# EAGLE board rev6 (EAGLE 9.4.2)
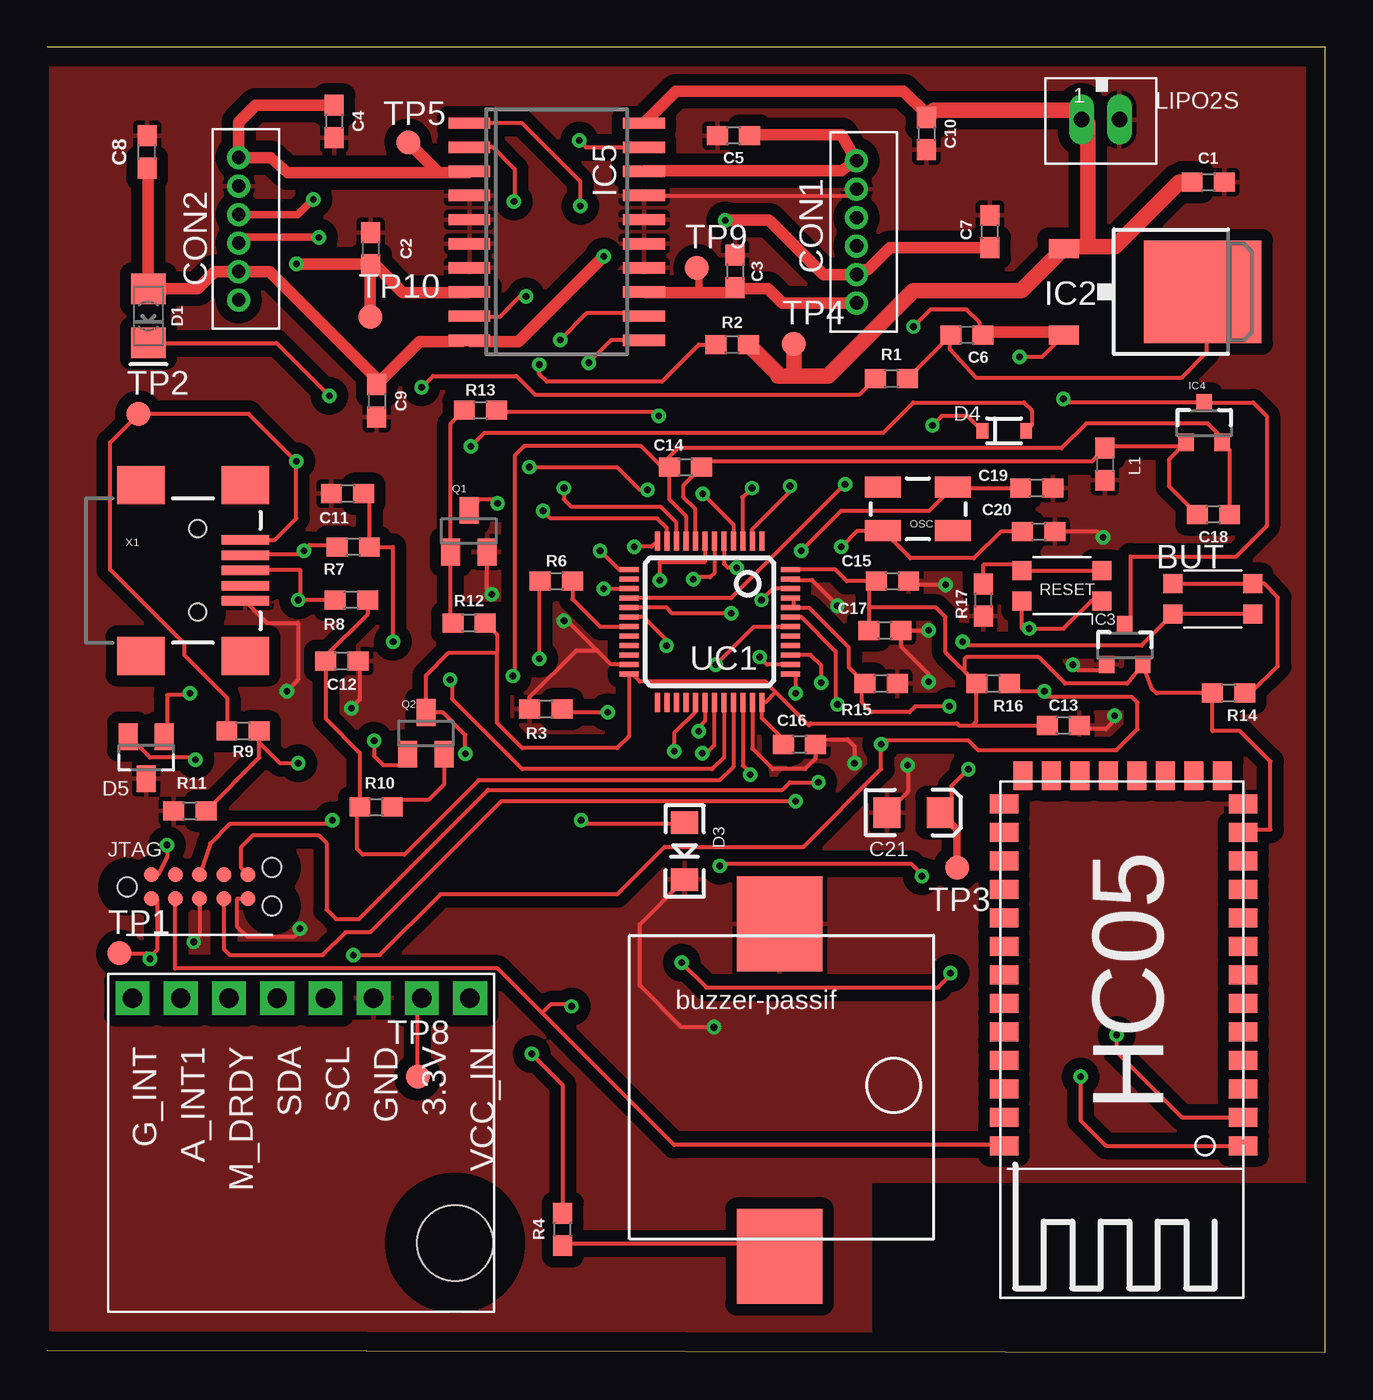
[diagram p0: board, top side]
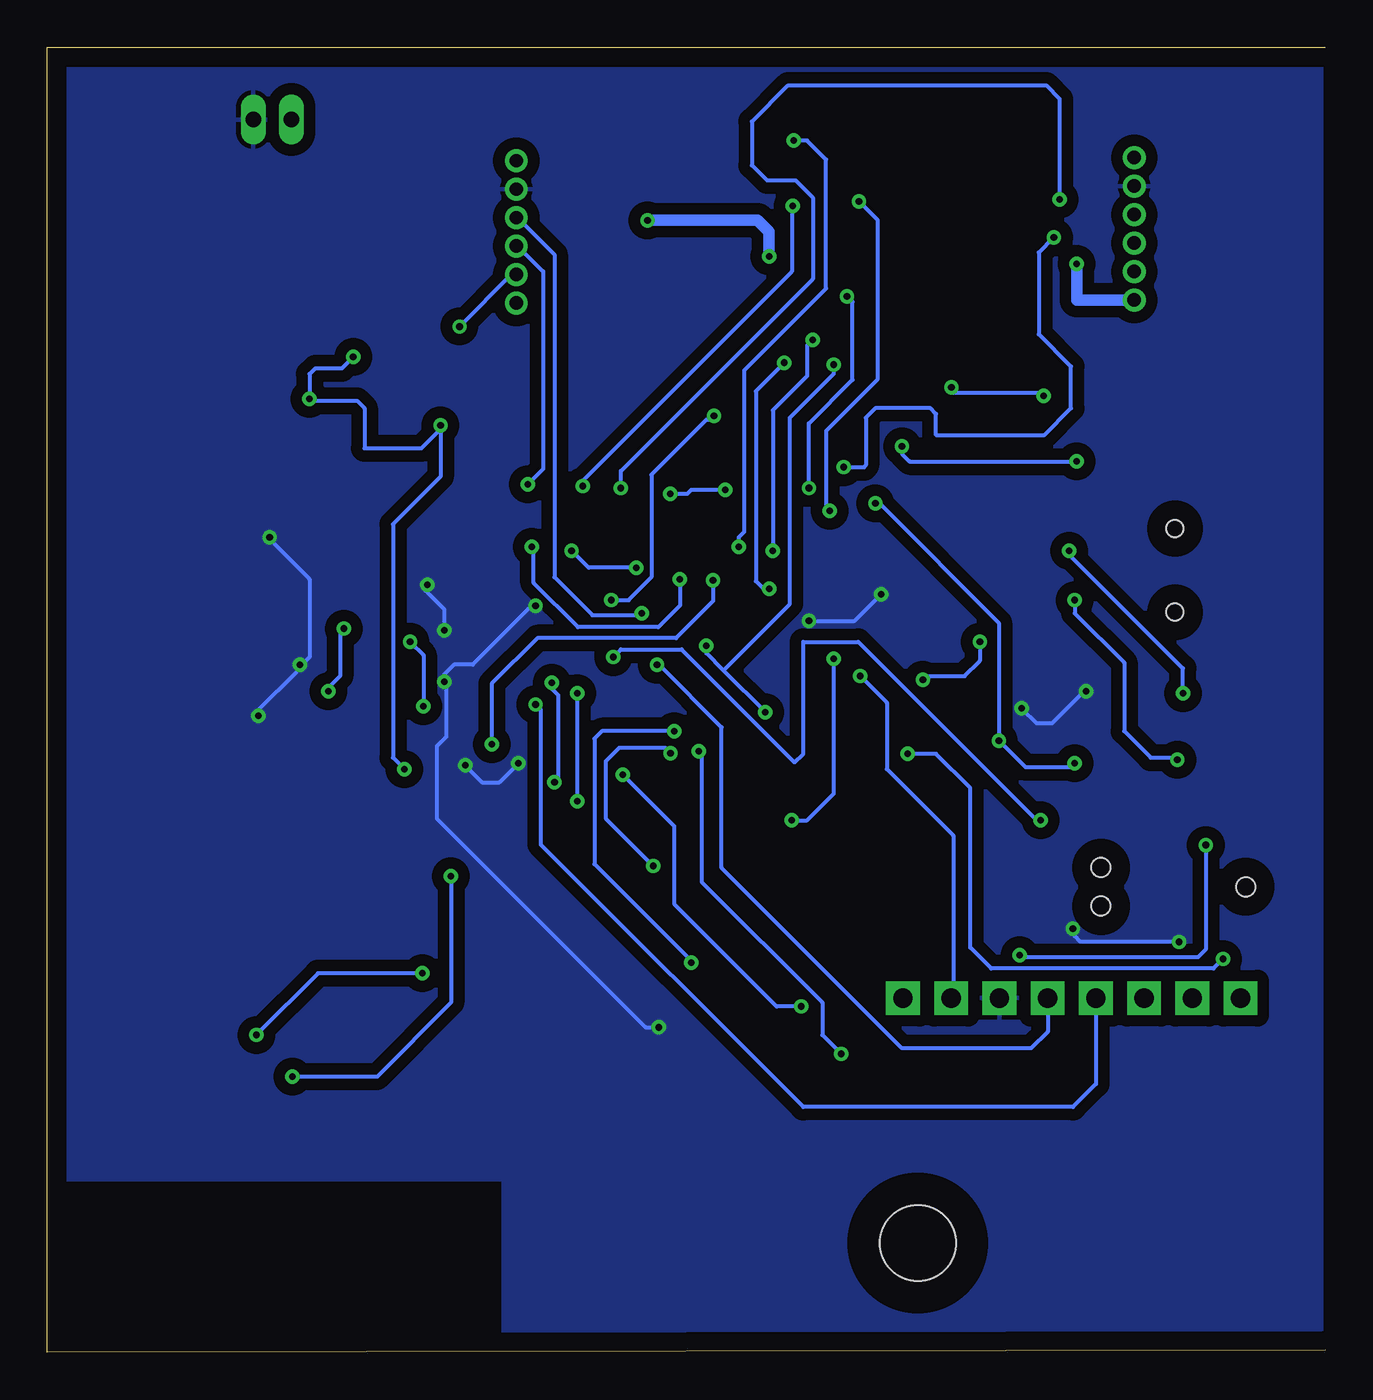
[diagram p1: board, bottom side, seen from below]

Size 67.3 x 68.7 mm. Coordinates in mm from the lower left corner, seen from the top.
Outline: 0,0.1 67.3,0 67.3,68.7 0,68.7
Copper layers (1*16): Top 0.035mm / dielectric 1.5mm / Bottom 0.035mm
Design rules "default": minimum track width 6mil, minimum drill 0.35mm, track to track 6mil, track to pad 6mil, pad to pad 6mil, via to via 6mil, smd to smd 6mil, copper to edge 40mil, drill to drill 6mil, minimum pad ring 10mil, minimum via ring 8mil, stop-mask expansion 4mil, vias tented up to drill 0mil, thermal gap 10mil
Net classes: 0 default: width 0.203 mm; 2 bigalime: width 0.381 mm

## Footprints (pad centres in the part's own frame; a part is rotated, then mirrored left to right if it is on the bottom)
PUSHBUTTON-KMR241GLFS = smd 1 x 1: P$1 2.1,0.8; P$2 2.1,-0.8; P$3 -2.1,0.8; P$4 -2.1,-0.8
0603 = smd 1.1 x 1: 1 -0.85,0; 2 0.85,0
EIA3216 = smd 1.4 x 1.6: A 1.4,0; C -1.4,0
B6B-ZR = drill 0.7: 1 9,-1.3; 2 7.5,-1.3; 3 6,-1.3; 4 4.5,-1.3; 5 3,-1.3; 6 1.5,-1.3
FKIT-LED-1206 = smd 1.6 x 1.803: A -1.422,0; C 1.422,0
LED-1206 = smd 1.2 x 1.4: A -1.5,0; C 1.5,0
SOD-323 = smd 0.63 x 0.83: 1 -1.15,0; 2 1.15,0
SOT23 = smd 1 x 1.4: 1 -0.95,-1.1; 2 0.95,-1.1; 3 0,1.1
DPACK_3 = smd 1 x 1.6: 1 -2.28,-4.8; 3 2.28,-4.8 | smd 5.4 x 6.2: 4 0,2.5
SOT23' = smd 0.8 x 0.9: 1 -0.95,-1; 2 0.95,-1; 3 0,1.1
SO20 = smd 0.6 x 2.2: 1 -5.715,-4.6; 2 -4.445,-4.6; 3 -3.175,-4.6; 4 -1.905,-4.6; 5 -0.635,-4.6; 6 0.635,-4.6; 7 1.905,-4.6; 8 3.175,-4.6; 9 4.445,-4.6; 10 5.715,-4.6; 11 5.715,4.6; 12 4.445,4.6; 13 3.175,4.6; 14 1.905,4.6; 15 0.635,4.6; 16 -0.635,4.6; 17 -1.905,4.6; 18 -3.175,4.6; 19 -4.445,4.6; 20 -5.715,4.6
TC2030-MCP-NL = smd 0.787 x 0.787: 1 1.27,-0.635; 2 2.54,-0.635; 3 3.81,-0.635; 4 5.08,-0.635; 5 6.35,-0.635; 6 6.35,0.635; 7 5.08,0.635; 8 3.81,0.635; 9 2.54,0.635; 10 1.27,0.635 | hole 1: 0,0; 7.62,-1.016; 7.62,1.016
JST_B2B-PH_HEADER = drill 0.8 long: P1 1.075,0.048; P2 -0.925,0.048
CRYSTAL-SMD-5X3 = smd 1.9 x 1.1: 1 -1.85,-1.15; 2 1.85,-1.15; 3 1.85,1.15; 4 -1.85,1.15
B1,27 = smd 1.27 x 1.27: TP 0,0
BUZZER-PASSIF = smd 4.5 x 5: P$1 0,2.5; P$2 0,20
HC-05 = smd 1.5 x 1: 3.3 0,-16.5; GND 0,-18; KEY 12.6,0; P$3 0,-3; P$4 0,-4.5; P$5 0,-6; P$6 0,-7.5; P$7 0,-9; P$8 0,-10.5; P$9 0,-12; P$10 0,-13.5; P$11 0,-15; P$23 12.6,-1.5; P$24 12.6,-3; P$25 12.6,-4.5; P$26 12.6,-6; P$27 12.6,-7.5; P$28 12.6,-9; P$29 12.6,-10.5; P$30 12.6,-12; P$31 12.6,-13.5; P$32 12.6,-15; P$33 12.6,-16.5; P$34 12.6,-18; RX 0,-1.5; TX 0,0 | smd 1 x 1.5: P$14 1.1,-19.5; P$15 2.6,-19.5; P$16 4.1,-19.5; P$17 5.6,-19.5; P$18 7.1,-19.5; P$19 8.6,-19.5; P$20 10.1,-19.5; P$21 11.6,-19.5
GY-85 = drill 1.016 pad 1.778 square: 3.3 0,15.24; A_INT1 0,2.54; G_INT 0,0; GND 0,12.7; M_DRDY 0,5.08; SCL 0,10.16; SDA 0,7.62; VCC_IN 0,17.78 | hole 4: 12.9,17
LQFP48 = smd 0.254 x 1: 1 -2.75,-4.25; 2 -2.25,-4.25; 3 -1.75,-4.25; 4 -1.25,-4.25; 5 -0.75,-4.25; 6 -0.25,-4.25; 7 0.25,-4.25; 8 0.75,-4.25; 9 1.25,-4.25; 10 1.75,-4.25; 11 2.25,-4.25; 12 2.75,-4.25; 25 2.75,4.25; 26 2.25,4.25; 27 1.75,4.25; 28 1.25,4.25; 29 0.75,4.25; 30 0.25,4.25; 31 -0.25,4.25; 32 -0.75,4.25; 33 -1.25,4.25; 34 -1.75,4.25; 35 -2.25,4.25; 36 -2.75,4.25 | smd 1 x 0.254: 13 4.25,-2.75; 14 4.25,-2.25; 15 4.25,-1.75; 16 4.25,-1.25; 17 4.25,-0.75; 18 4.25,-0.25; 19 4.25,0.25; 20 4.25,0.75; 21 4.25,1.25; 22 4.25,1.75; 23 4.25,2.25; 24 4.25,2.75; 37 -4.25,2.75; 38 -4.25,2.25; 39 -4.25,1.75; 40 -4.25,1.25; 41 -4.25,0.75; 42 -4.25,0.25; 43 -4.25,-0.25; 44 -4.25,-0.75; 45 -4.25,-1.25; 46 -4.25,-1.75; 47 -4.25,-2.25; 48 -4.25,-2.75
USB-MINIB = smd 2.5 x 0.5: D+ 2.5,0; D- 2.5,0.8; GND 2.5,-1.6; ID 2.5,-0.8; VBUS 2.5,1.6 | smd 2.5 x 2: GND@1 -3,-4.5; GND@2 -3,4.5; GND@3 2.5,4.5; GND@4 2.5,-4.5 | hole 0.9: 0,2.2; 0,-2.2

## Placement (x,y rotation side)
BUT  KMR211GLFS  [PUSHBUTTON-KMR241GLFS]  61.37,39.66 0 top
C1  0.1uF  [0603]  61.13,61.61 0 top
C2  22nF  [0603]  17.02,58.11 270 top
C3  22nF  [0603]  36.21,56.91 270 top
C4  22nF  [0603]  15.1,64.81 270 top
C5  22nF  [0603]  36.13,64.06 180 top
C6  0.1uF  [0603]  48.42,53.56 180 top
C7  22nF  [0603]  49.64,59.01 90 top
C8  22nF  [0603]  5.24,63.2 90 top
C9  22nF  [0603]  17.34,50.09 270 top
C10  22nF  [0603]  46.28,64.16 270 top
C11  47pF  [0603]  15.8,45.2 180 top
C12  47pF  [0603]  15.5,36.4 0 top
C13  10uF  [0603]  53.5,33 0 top
C14  1uF  [0603]  33.6,46.6 0 top
C15  1uF  [0603]  44.5,40.6 0 top
C16  1uF  [0603]  39.6,32 0 top
C17  1uF  [0603]  44.1,38 0 top
C18  10uF  [0603]  61.4,44.1 180 top
C19  18pF  [0603]  52.1,45.5 0 top
C20  18pF  [0603]  52.2,43.2 0 top
C21  100uF  [EIA3216]  45.61,28.41 0 top
CON1  B6B-ZR  [B6B-ZR]  41.31,53.74 90 top
CON2  B6B-ZR  [B6B-ZR]  8.77,53.9 90 top
D1  [FKIT-LED-1206]  5.31,54.56 270 top
D3  Blue  [LED-1206]  33.55,26.38 270 top
D4  [SOD-323]  50.39,48.51 0 top
D5  PESD1CAN  [SOT23]  5.2,31.3 180 top
IC2  MC78M05ABDT  [DPACK_3]  58.32,55.83 270 top
IC3  MCP1703T-3302E/CB  [SOT23']  56.73,37.21 0 top
IC4  MCP1703T-3302E/CB  [SOT23']  60.91,48.91 0 top
IC5  L293DD  [SO20]  26.82,59 270 top
JTAG  TC2050-MCP-NL  [TC2030-MCP-NL]  4.2,24.5 0 top
L1  ferrite bead  [0603]  55.68,46.76 270 top
LIPO2S  JST-PH_2-PIN_HEADER  [JST_B2B-PH_HEADER]  55.53,64.95 180 top
OSC  8MHz  [CRYSTAL-SMD-5X3]  45.84,44.4 0 top
Q1  NPN-BJT  [SOT23]  22.19,43.23 0 top
Q2  NPN-BJT  [SOT23]  19.93,32.58 0 top
R1  133  [0603]  44.44,51.27 0 top
R2  60k  [0603]  36.06,53.06 0 top
R3  30k  [0603]  26.25,33.86 180 top
R4  100  [0603]  27.14,6.46 90 top
R6  1k  [0603]  26.8,40.6 0 top
R7  22  [0603]  16.1,42.4 180 top
R8  22  [0603]  16,39.6 180 top
R9  10k  [0603]  10.3,32.7 180 top
R10  1.5k  [0603]  17.3,28.7 0 top
R11  36k  [0603]  7.5,28.5 0 top
R12  47k  [0603]  22.2,38.4 0 top
R13  1k  [0603]  22.8,49.6 0 top
R14  1k  [0603]  62.2,34.7 180 top
R15  10k  [0603]  43.9,35.2 180 top
R16  10k  [0603]  49.8,35.2 180 top
R17  1k  [0603]  49.3,39.6 90 top
RESET  KMR211GLFS  [PUSHBUTTON-KMR241GLFS]  53.42,40.36 0 top
TP1  PTR1B1,27  [B1,27]  3.8,21 0 top
TP2  PTR1B1,27  [B1,27]  4.8,49.4 0 top
TP3  PTR1B1,27  [B1,27]  47.9,25.5 0 top
TP4  PTR1B1,27  [B1,27]  39.3,53.1 0 top
TP5  PTR1B1,27  [B1,27]  19,63.7 0 top
TP8  PTR1B1,27  [B1,27]  19.5,14.5 0 top
TP9  PTR1B1,27  [B1,27]  34.2,57.1 0 top
TP10  PTR1B1,27  [B1,27]  17,54.5 0 top
U$1  BUZZER-PASSIF  [BUZZER-PASSIF]  38.56,25.04 180 top
U$4  HC05  [HC-05]  62.97,10.86 180 top
U$6  GY-85  [GY-85]  4.47,18.64 270 top
UC1  STM32F103CBT6  [LQFP48]  34.87,38.46 180 top
X1  USB-MINIB  [USB-MINIB]  7.92,41.16 0 top

## Library data of the parts
BUT IC3 IC4 RESET = okie
C1 C6 C11-C20 = SparkFun-Capacitors; PROD_ID: CAP-00810
C2-C5 C7-C10 = SparkFun-Capacitors; PROD_ID: CAP-07885
C21 D4 L1 = SparkFun3
CON1 CON2 = jst
D1 = SparkFun-LED
D3 = SparkFun
D5 = diode
IC2 = linear
IC5 = st-microelectronics; OC_FARNELL: unknown
JTAG = TC2050
LIPO2S = srg
OSC Q1 Q2 X1 = SparkFun2
R1-R4 R6-R17 = SparkFun-Resistors; PROD_ID: RES-08787
TP1-TP5 TP8-TP10 = testpad
U$1 = buzzer_smd
U$4 = rhoban; FARNELL: MODULE HC-05
U$6 = rhoban
UC1 = stm32

## Nets
1A: IC5.2 UC1.11
2A: IC5.9 UC1.10
3/AIN: R2.1 R3.1 UC1.18
3A: IC5.12 UC1.13
4A: IC5.19 UC1.12
5V: C6.1 C7.1 C8.1 C9.1 C21.A CON1.5 CON2.5 D1.A D4.1 IC2.3 IC3.3 IC4.3 IC5.10 TP3.TP
9V: C1.1 C10.1 IC2.1 IC5.20 LIPO2S.P1 R2.2 TP4.TP
23_USBDP: C12.1 R8.1 R10.1 UC1.33
24_USBDM: C11.1 R7.1 UC1.32
27/PWM: R4.2 UC1.29
32: BUT.P$2 BUT.P$4 R15.2 UC1.44 UC1.45
33: R6.2 UC1.19
+5V/2: D4.2 R9.2 TP2.TP X1.VBUS
AV+: C14.1 C18.1 IC4.2 TP8.TP U$6.3.3 UC1.9
AV-: C14.2 C18.2 IC4.1 L1.1 UC1.8
DGND: C1.2 C2.1 C3.1 C4.2 C5.2 C7.2 C8.2 C9.2 C10.2 C11.2 C12.2 C13.2 C15.2 C16.2 C17.2 C19.2 C20.2 C21.C CON1.2 CON2.2 D3.C D5.3 IC3.1 IC5.4 IC5.5 IC5.6 IC5.7 IC5.14 IC5.15 IC5.16 IC5.17 JTAG.3 JTAG.5 L1.2 LIPO2S.P2 Q1.2 R3.2 R11.1 R15.1 R17.1 U$1.P$1 U$4.GND U$6.GND UC1.23 UC1.35 UC1.47 X1.GND
DISC: R13.2 UC1.46
EN: JTAG.2 U$4.KEY UC1.34
GNDA: C6.2 IC2.4 R1.2
MM4: CON2.3 UC1.3
MM5: CON2.4 UC1.4
MM6: CON1.4 UC1.16
MM7: CON1.3 UC1.17
MM28: IC5.1 UC1.2
MM29: IC5.11 UC1.15
N$1: D1.C R1.1
N$2: R4.1 U$1.P$2
N$3: JTAG.6 UC1.39
N$4: JTAG.8 UC1.38
N$5: JTAG.4 UC1.37
N$6: UC1.40
N$20: BUT.P$1 BUT.P$3 R14.1
N$21: R17.2 RESET.P$1 RESET.P$3
N$22: D3.A R6.1
N$51: Q2.2 R10.2
N$59: D5.1 R7.2 X1.D-
N$60: D5.2 R8.2 X1.D+
N$71: Q1.3 Q2.1 R9.1 R11.2
N$73: Q1.1 R12.1 R13.1
NONE: U$6.VCC_IN
OSC_IN: C19.1 OSC.3 UC1.5
OSC_OUT: C20.1 OSC.1 UC1.6
OUT1: C4.1 CON2.1 IC5.3 TP5.TP
OUT2: C2.2 CON2.6 IC5.8 TP10.TP
OUT3: C3.2 CON1.6 IC5.13 TP9.TP
OUT4: C5.1 CON1.1 IC5.18
RESET: JTAG.10 R16.1 RESET.P$2 RESET.P$4 UC1.7
RX: U$4.RX UC1.30
SCL: U$6.SCL UC1.42
SDA: U$6.SDA UC1.43
TX: U$4.TX UC1.31
VBAT: UC1.1
VCC: C13.1 C15.1 C16.1 C17.1 IC3.2 JTAG.1 Q2.3 R12.2 R14.2 R16.2 TP1.TP U$4.3.3 UC1.24 UC1.36 UC1.48

## Tracks (layer width: path | path; a pad name or v marks a point on that pad's centre or on a via)
1A  (via drill 0.35)
  Top 0.203: UC1.11 32.62,43.38 32.1,43.9 26.5,43.9 v26.1,44.3 | v24.57,60.6 24.6,60.63 24.6,62.3 23.46,63.44 IC5.2
  Bottom 0.203: v26.1,44.3 26.3,44.5 26.3,48.5 23.6,51.2 23.6,59.63 v24.57,60.6
2A  (via drill 0.35)
  Top 0.203: UC1.10 33.12,43.68 32.3,44.5 27.6,44.5 27.2,44.9 v27.2,45.5 | v25.2,55.6 24.9,55.6 23.8,54.5 22.27,54.5 IC5.9
  Bottom 0.203: v27.2,45.5 27.2,48.9 24.9,51.2 24.9,55.3 v25.2,55.6
3/AIN  (via drill 0.35)
  Top 0.203: v32.6,37.2 32.6,37.5 31.4,38.7 30.8,38.7 UC1.18 | v25.9,52 25.9,51.5 26.3,51.1 32.35,51.1 34.31,53.06 R2.1 | R3.1 27.25,33.7 v29.5,33.7
  Bottom 0.203: 31.7,35.9 v29.5,33.7 | 31.7,35.9 32.6,36.8 v32.6,37.2 | 31.7,35.9 28.2,39.4 28.2,49.2 25.9,51.5 v25.9,52
3A  (via drill 0.35)
  Top 0.203: UC1.13 30.1,41.2 v29.1,42.2 | v27,53.3 28.4,54.7 31.3,54.7 IC5.12
  Bottom 0.203: v27,53.3 27.3,53 27.3,51.4 29.1,49.6 v29.1,42.2
4A  (via drill 0.35)
  Top 0.203: v30.9,42.4 v30.91,42.41 31.82,42.41 UC1.12 | v28,63.8 28.36,63.44 IC5.19
  Bottom 0.203: v30.9,42.4 30.9,42.9 30.6,43.2 30.6,51.7 26.3,56 26.3,62.8 27.3,63.8 v28,63.8
5V  (via drill 0.35)
  Top 0.203: 49.4,53.7 C6.1 49.07,53.76 49.07,54.23 48.4,54.9 46.5,54.9 v45.6,54 | 53.3,53.7 IC2.3 52.38,52.4 v51.2,52.4 | 21.8,53.2 IC5.10 22.3,53.2 | 5.3,62.31 C8.1 | 5.3,56.2 D1.A | 17.28,51.32 C9.1 | D4.1 48.45,49.3 47.1,49.3 v46.6,48.8 | v53.5,50.2 53.7,50 IC4.3 63.49,50.01 64.2,49.3 64.2,43.5 62.6,41.9 57.03,41.9 57.03,38.61 IC3.3 | v48.5,30.7 47.6,29.8 47.6,29 C21.A
  Top 0.406: C21.A 47.9,27.51 TP3.TP
  Top 0.61: 53.3,53.7 49.4,53.7 | C7.1 44.36,58.16 43.2,57 42.61,57 CON1.5 40.86,56.74 38,59.6 v35.7,59.6 | C9.1 19.6,53.2 21.8,53.2 | 5.3,56.2 5.3,62.31 | D1.A 5.33,56 7.9,56 8.8,56.9 CON2.5 11.7,56.9 17.28,51.32 | v29.3,57.7 25.6,54 24.8,53.2 22.3,53.2
  Bottom 0.203: v45.6,54 42.9,56.7 42.7,56.7 | v48.5,30.7 49.1,31.3 49.1,43.6 46.6,46.1 v46.6,48.8 46.6,48.6 47.6,47.6 50.6,47.6 50.6,49.7 51,50.1 53.4,50.1 v53.5,50.2 53.5,51.5 53.2,51.8 51.8,51.8 v51.2,52.4
  Bottom 0.61: 42.7,56.7 CON1.5 | v29.3,57.7 29.3,59 29.9,59.6 v35.7,59.6
9V
  Top 0.203: 53.8,58.2 IC2.1 | 54.8,64.7 LIPO2S.P1 | 38.47,51.5 38.47,51.4
  Top 0.61: C10.1 46.28,65.21 45.09,66.4 33.1,66.4 IC5.20
  Top 0.813: C10.1 46.67,65.4 53.96,65.4 LIPO2S.P1 | IC2.1 53.51,58.11 51.3,55.9 45.6,55.9 41.1,51.4 39.3,51.4 | C1.1 59.61,61.61 56.2,58.2 54.8,58.2 | 53.8,58.2 54.8,58.2 | 54.8,58.2 54.8,64.7 | 38.47,51.4 39.3,51.4 | TP4.TP 39.3,51.4 | R2.2 38.47,51.5
23_USBDP
  Top 0.203: UC1.33 36.12,30.82 35.4,30.1 22.7,30.1 18.8,26.2 16.6,26.2 16.3,26.5 16.3,28.7 R10.1 16.45,31.55 14.65,33.35 C12.1 14.65,36.65 16.85,38.85 R8.1
24_USBDM  (via drill 0.35)
  Top 0.203: UC1.32 35.62,31.32 35,30.7 25,30.7 21.3,34.4 21.3,35.3 v21.2,35.4 | C11.1 16.95,44.9 R7.1 18.2,42.4 v18.2,37.4
  Bottom 0.203: v21.2,35.4 21,35.6 19,35.6 18.2,36.4 v18.2,37.4
27/PWM  (via drill 0.35)
  Top 0.203: UC1.29 34.12,33.71 33,32.59 v33,31.63 | v25.5,15.7 27.14,14.06 R4.2
  Bottom 0.203: v33,31.63 32.86,31.63 32.86,24.76 26.5,18.4 26.5,16.7 v25.5,15.7
32  (via drill 0.35)
  Top 0.203: 39.3,39.2 40.1,39.2 42.2,37.1 42.2,36.05 R15.2 42.9,35.05 42.9,34.2 43.4,33.7 45.4,33.7 45.7,34 v47.5,34 | 39.3,39.2 39.3,39.7 UC1.45 | 39.3,39.2 UC1.44 | v48.2,37.4 48.2,37.2 57.61,37.2 BUT.P$4 BUT.P$2
  Bottom 0.203: v48.2,37.4 47.5,36.7 v47.5,34
33
  Top 0.203: UC1.19 30.3,38.2 29.1,38.2 27.65,39.65 R6.2
+5V/2  (via drill 0.35)
  Top 0.203: D4.2 51.84,48.81 51.84,49.59 51.43,50 45.6,50 44,48.4 23,48.4 v22.3,47.7 | R9.2 9.45,34.45 7.2,36.7 7.2,37.3 3.3,41.2 3.3,47.9 TP2.TP 10.6,49.4 v13.1,46.9 13.1,43.9 11.96,42.76 X1.VBUS
  Bottom 0.203: v22.3,47.7 22.3,47.3 21.9,46.9 v13.1,46.9
AV+  (via drill 0.35)
  Top 0.203: UC1.9 33.62,44.02 32.75,44.89 C14.1 32.48,46.88 | v24.5,35.6 24.6,35.7 24.6,47.2 25.1,47.7 31.25,47.7 32.28,46.67 32.48,46.88 | TP8.TP 19.5,18.43 U$6.3.3 | C18.1 62.25,47.52 IC4.2 61.86,48.14 61.1,48.9 54.7,48.9 53.4,47.6 33.2,47.6 32.48,46.88
  Bottom 0.203: U$6.3.3 19.6,18.75 19.6,27.2 23.1,30.7 23.1,34.2 v24.5,35.6
AV-
  Top 0.203: C18.2 59.06,45.59 59.06,47.01 IC4.1 59.8,47.7 55.8,47.7 L1.1 55.3,47.2 55,46.9 34.75,46.9 C14.2 33.5,45.65 33.5,45 34.12,44.38 UC1.8
DGND  (via drill 0.35)
  Top 0.203: UC1.23 29.69,36.21 28.95,36.95 | 28.95,36.95 27.4,38.5 v27.2,38.5 | v23.4,39.9 23.14,40.16 Q1.2 | JTAG.3 8.01,21.91 v7.7,21.6 | v13.3,22.3 13.3,22.18 12.99,21.87 10.53,21.87 10,22.4 10,23.86 JTAG.5 | v56.2,33.5 56.32,33.38 55.75,32.8 54.55,32.8 C13.2 | v54,36.2 54.3,35.9 55.47,35.9 IC3.1 | v42.5,31 42.5,31.9 42.13,32.27 40.72,32.27 C16.2 40.45,31.25 39.9,30.7 38.2,30.7 37.12,31.78 UC1.35 | v45.3,30.9 45.3,29.5 C21.C | v55.6,42.9 55.3,43.2 C20.2 | X1.GND 11.58,38.4 13.2,38.4 13.2,35.4 v12.6,34.8 | v16,33.9 16.45,34.35 16.45,36.3 C12.2 | v35.1,17.1 33.4,17.1 31.2,19.3 31.2,22.53 D3.C | v46.4,35.3 46.4,35.7 44.95,37.15 C17.2 46,38 46.1,37.9 46.3,37.9 v46.4,38 | UC1.47 39.17,40.66 40.26,40.66 v41.61,39.31 v41.6,39.3 | v47.3,40.4 45.55,40.4 C15.2 | R3.2 25.4,34.5 27.85,36.95 28.95,36.95 | IC5.17 42.27,60.9 CON1.2
  Bottom 0.203: v27.2,38.5 24.8,38.5 v23.4,39.9 | v7.7,21.6 12.9,21.6 13.2,21.9 13.2,22.2 v13.3,22.3 | v42.5,31 43.5,30 44.4,30 v45.3,30.9 | v56.2,33.5 56.35,33.65 54,36 v54,36.2 53.9,36.2 53.5,36.6 53.5,40.7 55.6,42.8 v55.6,42.9 | v12.6,34.8 12.7,34.8 14.4,33.1 15.2,33.1 v16,33.9 | v35.1,17.1 35.8,17.1 46.8,28.1 46.8,31.9 46.3,32.4 46.3,35.2 v46.4,35.3 46.4,35.7 45.9,36.2 44.9,36.2 41.8,39.3 v41.6,39.3 | v46.4,38 46.4,39.1 47.4,40.1 47.4,40.3 v47.3,40.4
  pour Top (isolate 0.61): 0.2,68.4 67,68.4 67,9 43.3,9 43.3,0.4 0.2,0.4
  pour Bottom (isolate 0.61): 0.2,67.9 67,67.9 67,9.1 43.3,9.1 43.3,0.4 0.2,0.4
DISC  (via drill 0.35)
  Top 0.203: UC1.46 38.2,40.2 v37.6,39.6 | R13.2 23.75,49.5 32,49.5 v32.2,49.3
  Bottom 0.203: v32.2,49.3 32.4,49.1 32.6,49.1 35.5,46.2 35.5,40.8 36.7,39.6 v37.6,39.6
EN  (via drill 0.35)
  Top 0.203: JTAG.2 6.7,23.82 6.7,20.2 23.7,20.2 26.05,17.85 | 26.05,17.85 33,10.9 50.31,10.9 U$4.KEY | UC1.34 36.62,30.88 37,30.5 v37,30.4 | v27.6,18.2 27.5,18.3 26.5,18.3 26.05,17.85
  Bottom 0.203: v37,30.4 34.3,27.7 34.3,23.6 28.9,18.2 v27.6,18.2
GNDA
  Top 0.203: R1.2 46.6,52.58 C6.2 47.51,52.82 48.92,51.3 59.7,51.3 61.02,52.62 61.02,55.63 IC2.4
MM4  (via drill 0.35)
  Top 0.203: UC1.3 36.6,42.73 36.6,45 v37.1,45.5 | v14,60.7 13.8,60.5 13.77,60.5
  Top 0.406: 13.77,60.5 13.17,59.9 CON2.3
  Bottom 0.203: v37.1,45.5 37.1,46.4 27,56.5 27,60.8 27.9,61.7 29.4,61.7 30.2,62.5 30.2,64.8 28.3,66.7 14.7,66.7 14,66 v14,60.7
MM5  (via drill 0.35)
  Top 0.203: v25.37,46.6 30,46.6 31.2,45.4 v31.6,45.4 | v34.5,45.2 36.12,43.58 UC1.4
  Top 0.406: CON2.4 10.37,58.7 v14.3,58.7
  Bottom 0.203: v14.3,58.7 15.1,57.9 15.1,53.6 13.4,51.9 13.4,49.7 14.8,48.3 20.5,48.3 20.5,49.4 20.8,49.7 23.7,49.7 24.2,49.2 24.2,46.7 24.3,46.6 v25.37,46.6 | v31.6,45.4 33.4,45.4 33.6,45.2 v34.5,45.2
MM6  (via drill 0.35)
  Top 0.203: v42,45.7 36,39.7 30.8,39.7 UC1.16
  Bottom 0.203: v42,45.7 41.2,46.5 41.2,56.9 42.44,58.14 42.51,58.14 CON1.4
MM7  (via drill 0.35)
  Top 0.203: UC1.17 32.59,39.21 32.9,38.9 v36,38.9
  Bottom 0.203: v36,38.9 36.1,38.8 38.6,38.8 40.6,40.8 40.6,57.8 42.54,59.74 CON1.3
MM28  (via drill 0.35)
  Top 0.203: v39.1,45.6 39.1,45.3 37.1,43.3 37.1,42.73 UC1.2 | v28.05,60.35 28.05,61.65 24.99,64.71 IC5.1
  Bottom 0.203: v39.1,45.6 39.1,45.9 28.1,56.9 28.1,60.3 v28.05,60.35
MM29  (via drill 0.35)
  Top 0.203: v29.3,40.2 30.3,40.2 UC1.15 | IC5.11 29.68,53.28 v28.5,52.1
  Bottom 0.203: v29.3,40.2 29.6,40.2 30,40.6 30,50.6 v28.5,52.1
N$1  (via drill 0.35)
  Top 0.203: R1.1 42.73,50.4 25.7,50.4 24.7,51.4 20.3,51.4 v19.7,50.8 | D1.C 12.06,53.14 v14.85,50.35
  Bottom 0.203: v14.85,50.35 15,50.5 19.7,50.5 v19.7,50.8
N$2
  Top 0.203: R4.1 27.3,5.7 38.19,5.7 U$1.P$2
N$3  (via drill 0.35)
  Top 0.203: v40.6,30 39.1,30 38.7,29.6 23.2,29.6 16.4,22.8 15.2,22.8 14.7,23.3 14.7,26.8 14.3,27.2 10.8,27.2 10.2,26.6 10.2,25.48 JTAG.6 | v40.75,35.25 40.75,36.15 40.19,36.71 UC1.39
  Bottom 0.203: v40.6,30 40.4,30 40.4,34.6 40.75,34.95 v40.75,35.25
N$4  (via drill 0.35)
  Top 0.203: v15,28 14.8,27.8 9.6,27.8 8.56,26.76 JTAG.8 | v37.5,36.6 37.9,36.2 38.8,36.2 UC1.38
  Bottom 0.203: v15,28 15.2,28 24.6,37.4 27.5,37.4 27.5,31.5 27.95,31.05 33.9,37 37.1,37 v37.5,36.6
N$5  (via drill 0.35)
  Top 0.203: v39.4,29 23.9,29 17,22.1 15.7,22.1 14.5,20.9 9.6,20.9 9.28,21.22 JTAG.4 | v39.4,34.7 39.4,35.69 UC1.37
  Bottom 0.203: v39.4,34.7 v39.4,29
N$20
  Top 0.203: BUT.P$3 BUT.P$1 64.07,40.46 64.8,39.73 64.8,36.1 64.75,36.1 63.35,34.7 R14.1
N$21
  Top 0.203: RESET.P$1 RESET.P$3 51.02,41.46 49.3,41.46 R17.2
N$22  (via drill 0.35)
  Top 0.203: D3.A 33.47,27.8 28.3,27.8 v28.1,28 | R6.1 25.9,40.55 v25.9,36.5
  Bottom 0.203: v28.1,28 27.3,28 25.9,29.4 v25.9,36.5
N$51
  Top 0.203: Q2.2 20.88,29.88 20.1,29.1 18.55,29.1 R10.2
N$59  (via drill 0.35)
  Top 0.203: X1.D- 10.48,42 13.3,42 v13.5,42.2 13.8,42.5 15.15,42.5 R7.2 | v7.5,34.7 7.4,34.6 6.3,34.6 6.3,32.7 D5.1
  Bottom 0.203: v13.5,42.2 13.5,42 7.5,36 v7.5,34.7
N$60  (via drill 0.35)
  Top 0.203: X1.D+ 10.8,41.2 13.3,41.2 13.3,39.6 | D5.2 4.3,32.4 5.4,31.3 7.7,31.3 v7.8,31.2 | 13.3,39.6 v13.2,39.6 | R8.2 13.3,39.6
  Bottom 0.203: v7.8,31.2 7.9,31.3 9.2,31.3 10.6,32.7 10.6,36.3 13.2,38.9 v13.2,39.6
N$71  (via drill 0.35)
  Top 0.203: v17.2,32.2 17.2,31.4 17.7,30.9 18.84,30.9 Q2.1 | v13.2,31 12.25,31 11.15,32.1 R9.1 11.15,31.3 R11.2 | v23.7,44.7 23.5,44.9 22.76,44.9 Q1.3
  Bottom 0.203: v13.2,31 13.4,30.8 15.8,30.8 v17.2,32.2 17.2,38.4 23.5,44.7 v23.7,44.7
N$73
  Top 0.203: R13.1 21.24,48.89 Q1.1 21.24,38.51 R12.1
OSC_IN  (via drill 0.35)
  Top 0.203: v36.3,41.3 35.83,41.3 35.62,41.51 UC1.5 | v39.7,42.2 41.8,44.3 46.44,44.3 OSC.3 47.74,45.5 C19.1
  Bottom 0.203: v36.3,41.3 38.8,41.3 v39.7,42.2
OSC_OUT  (via drill 0.35)
  Top 0.203: UC1.6 35.12,41.02 34.9,40.8 34.1,40.8 v34,40.7 | v41.8,42.4 42.65,43.25 OSC.1 45.44,41.8 48.8,41.8 50.2,43.2 C20.1
  Bottom 0.203: v34,40.7 34,39.3 35.13,38.17 39.37,38.17 41.7,40.5 41.7,42.3 v41.8,42.4
OUT1
  Top 0.203: 20.5,62.2 20.5,62.1
  Top 0.61: C4.1 10.96,65.66 10.07,64.77 CON2.1 11.75,62.9 12.65,62.1 20.5,62.1 22.14,62.1 IC5.3 | TP5.TP 20.5,62.2
OUT2  (via drill 0.35)
  Top 0.203: 17.3,57.2 C2.2 17,57.27 16.97,57.3 | 22.14,55.8 IC5.8
  Top 0.61: 17.3,57.2 18.7,55.8 22.14,55.8 | 16.97,57.3 v13.1,57.3 | TP10.TP 17,57.27
  Bottom 0.61: CON2.6 13.1,55.4 v13.1,57.3
OUT3
  Top 0.203: 36.33,56 C3.2 | 31.49,55.8 IC5.13 | TP9.TP 34.3,57
  Top 0.406: 34.3,57 34.3,55.8
  Top 0.61: CON1.6 38.71,55.24 37.95,56 36.33,56 | 31.49,55.8 34.3,55.8 35.83,55.8 C3.2
OUT4
  Top 0.203: C5.1 37.02,64.1
  Top 0.61: 37.02,64.1 41.81,64.1 CON1.1 41.81,62.2 31.44,62.2 IC5.18
RESET  (via drill 0.35)
  Top 0.203: JTAG.10 5.83,25.13 6.3,26.1 v6.3,26.7 | v32.25,40.65 32.25,41.61 34.62,41.61 UC1.7 | v16.1,20.9 17.5,20.9 20.7,24.1 30,24.1 32.5,26.6 39.8,26.6 43.9,30.7 v43.9,32 44.1,32.2 48.5,32.2 49,31.7 56.3,31.7 57.4,32.8 57.4,34.2 57.1,34.5 52.5,34.5 v52.5,34.8 51.05,34.8 R16.1 | RESET.P$2 54.96,39.56 53.5,38.1 v51.7,38.1 51.32,38.1 RESET.P$4
  Bottom 0.203: v32.25,40.65 32.25,39.55 34.2,37.6 41.5,37.6 43.9,35.2 v43.9,32 | v51.7,38.1 51.9,37.9 51.9,35.6 52.5,35 v52.5,34.8 | v16.1,20.9 16.1,20.8 6.7,20.8 6.3,21.2 v6.3,26.7
RX  (via drill 0.35)
  Top 0.203: UC1.30 34.62,33.22 34.3,32.9 v34.3,32.7 | v33.4,20.5 34.7,19.2 46.9,19.2 47.6,19.9 v47.55,19.95 | v56.3,16.7 56.3,15.8 59.74,12.36 U$4.RX
  Bottom 0.203: v34.3,32.7 38.1,32.7 38.5,32.3 38.5,25.7 33.5,20.7 33.4,20.7 v33.4,20.5 | v47.55,19.95 53.05,19.95 v56.3,16.7
SCL  (via drill 0.35)
  Top 0.203: v35.2,36.2 37.2,38.2 38.8,38.2 UC1.42
  Bottom 0.203: v35.2,36.2 35.1,36.2 31.8,32.9 31.8,25.5 22.3,16 15.5,16 14.63,16.87 U$6.SCL
SDA  (via drill 0.35)
  Top 0.203: v41.6,34.1 41.5,34.2 41.5,36.9 39.7,38.7 39.3,38.7 UC1.43
  Bottom 0.203: v41.6,34.1 41.33,33.83 41.33,26.73 27.5,12.9 13.3,12.9 12.09,14.11 U$6.SDA
TX  (via drill 0.35)
  Top 0.203: v34.49,31.53 34.69,31.53 35.12,31.96 UC1.31 | UC1.31 | v35.4,25.6 35.5,25.7 45.5,25.7 46.1,25.1 v46.05,25.05 | U$4.TX 55.74,10.86 54.4,12.2 v54.4,14.5
  Bottom 0.203: v46.05,25.05 46.05,18.4 49.95,14.5 v54.4,14.5 | v34.49,31.53 34.79,31.83 37.17,31.83 37.9,31.1 37.9,28.1 v35.4,25.6
VCC  (via drill 0.35)
  Top 0.203: 23.67,36.8 21.1,36.8 19.93,35.63 Q2.3 20.82,33.68 22,32.5 v22,31.5 | U$4.3.3 62.99,27.5 64.4,27.5 64.4,31.1 62.8,32.7 61.35,32.7 R14.2 58.4,34.7 58.2,34.9 IC3.2 56.86,35.2 53.6,35.2 52.2,36.6 48.4,36.6 48.3,36.5 48.3,35.85 R16.2 | 48.7,33 48.9,33.2 48.9,35.15 R16.2 | 38.35,34.75 37.8,35.3 31.2,35.3 30.8,35.7 UC1.24 30.62,32.42 30,31.8 25,31.8 23.67,33.13 23.67,36.8 | JTAG.1 5.77,23.86 5.77,21.17 5.4,20.8 | v5.4,20.7 5.4,20.8 | 38.35,34.75 37.81,34.21 UC1.36 37.62,33.38 38.75,32.25 C16.1 | TP1.TP 5.2,21 5.4,20.8 | 48.7,33 48,33 47.9,33.1 40.2,33.1 40.1,33 38.35,34.75 | 48.7,33 C13.1 | UC1.48 41.5,41.2 42.1,40.6 C15.1 43.25,40.2 43.25,39.2 | 43.25,39.2 C17.1 | R12.2 23.67,37.78 23.67,36.8 | R16.2 47.3,36.85 47.3,38.7 46.8,39.2 43.25,39.2
  Bottom 0.203: v5.4,20.7 5.9,20.2 17.6,20.2 18.7,21.3 18.7,29.7 20.5,31.5 v22,31.5